# EAGLE board v1_schematic (EAGLE 9.0.1)

Size 166.17 x 99.43 mm. Coordinates in mm from the lower left corner, seen from the top.
Outline: 0.38,0.13 166.17,0 165.91,99.43 0,99.05 0.38,0.13
Copper layers (1*16): Top 0.035mm / dielectric 1.5mm / Bottom 0.035mm
Design rules "default": minimum track width 6mil, minimum drill 0.35mm, track to track 6mil, track to pad 6mil, pad to pad 6mil, via to via 6mil, smd to smd 6mil, copper to edge 40mil, drill to drill 6mil, minimum pad ring 10mil, minimum via ring 8mil, stop-mask expansion 4mil, vias tented up to drill 0mil, thermal gap 10mil

## Footprints (pad centres in the part's own frame; a part is rotated, then mirrored left to right if it is on the bottom)
C0805 = smd 1.3 x 1.5: 1 -0.95,0; 2 0.95,0
153CLV-1014 = smd 4.3 x 2.5: + 4.15,0; - -4.15,0
E5-6 = drill 0.813 pad 1.905: + -2.54,0 | drill 0.813 pad 1.905 octagon: - 2.54,0
0603-CAP = smd 1.1 x 1: 1 -0.85,0; 2 0.85,0
C4111-15 = drill 1.499 long: A 7.62,0; C -7.62,0
SOD323(F) = smd 0.5 x 0.5: 1 1.1,0; 2 -1.1,0
SJ_2W = smd 1.27 x 2.54: 1 -2.54,0; 2 0,0; 3 2.54,0
3,2-PAD = drill 3.2 pad 5.842: B3,2 0,0
DIL08 = drill 0.813 long: 1 -3.81,-3.81; 2 -1.27,-3.81; 3 1.27,-3.81; 4 3.81,-3.81; 5 3.81,3.81; 6 1.27,3.81; 7 -1.27,3.81; 8 -3.81,3.81
SSOP28 = smd 0.4 x 1.5: 1 -4.225,-3.625; 2 -3.575,-3.625; 3 -2.925,-3.625; 4 -2.275,-3.625; 5 -1.625,-3.625; 6 -0.975,-3.625; 7 -0.325,-3.625; 8 0.325,-3.625; 9 0.975,-3.625; 10 1.625,-3.625; 11 2.275,-3.625; 12 2.925,-3.625; 13 3.575,-3.625; 14 4.225,-3.625; 15 4.225,3.625; 16 3.575,3.625; 17 2.925,3.625; 18 2.275,3.625; 19 1.625,3.625; 20 0.975,3.625; 21 0.325,3.625; 22 -0.325,3.625; 23 -0.975,3.625; 24 -1.625,3.625; 25 -2.275,3.625; 26 -2.925,3.625; 27 -3.575,3.625; 28 -4.225,3.625
DIL20 = drill 0.813 long: 1 -11.43,-3.81; 2 -8.89,-3.81; 3 -6.35,-3.81; 4 -3.81,-3.81; 5 -1.27,-3.81; 6 1.27,-3.81; 7 3.81,-3.81; 8 6.35,-3.81; 9 8.89,-3.81; 10 11.43,-3.81; 11 11.43,3.81; 12 8.89,3.81; 13 6.35,3.81; 14 3.81,3.81; 15 1.27,3.81; 16 -1.27,3.81; 17 -3.81,3.81; 18 -6.35,3.81; 19 -8.89,3.81; 20 -11.43,3.81
TO220-5 = drill 0.9 long: 1 -3.4,-8.4; 2 -1.7,-4.5; 3 0,-8.4; 4 1.7,-4.5; 5 3.4,-8.4
JP2W = drill 0.914 long: 1 -2.54,-1.27; 2 0,-1.27; 3 2.54,-1.27
0402 = smd 0.7 x 0.9: 1 -0.65,0; 2 0.65,0
PE-53116NL = drill 1.01 pad 1.51: 1 2.54,-15.88; 2 15.24,-15.88
SML0805 = smd 1.2 x 1.2: A 1.05,0; C -1.05,0
QS = drill 0.61 long: 1 -2.54,0; 2 2.54,0
TO18 = drill 0.813 octagon: 1 -1.27,-1.27; 2 1.27,-1.27; 3 1.27,1.27
SOT23 = smd 1 x 1.4: 1 -0.95,-1.1; 2 0.95,-1.1; 3 0,1.1
R0805 = smd 1.3 x 1.5: 1 -0.95,0; 2 0.95,0
PC25 = smd 2.2 x 0.8: 4 0,1.65 | smd 0.9 x 1.4: A -1.35,-1.9; E 1.35,-1.9; S 0,-1.9
STS121PC04 = drill 0.9 pad 1.8: 1 -2.5,0; 2 0,0; 3 2.5,0
DTS-6 = drill 1 long: 1 -3.25,2.25; 2 3.25,2.25; 3 -3.25,-2.25; 4 3.25,-2.25
ED350V-02P = drill 0.8: P$1 0,0; P$2 3.5,0
ON_SEMICONDUCTOR_NCP1117ST33T3G_0 = smd 2 x 1.5: 1 -3.15,2.3; 2 -3.15,0; 3 -3.15,-2.3 | smd 2 x 3.8: 4 3.15,0
ON_SEMICONDUCTOR_NCP1117ST50T3G_2 = smd 1.65 x 1: 1 -3.475,2.3; 2 -3.475,0; 3 -3.475,-2.3 | smd 1.65 x 3.2: 4 3.475,0
LQFP100 = smd 1.6 x 0.3: 1 -7.6,6; 2 -7.6,5.5; 3 -7.6,5; 4 -7.6,4.5; 5 -7.6,4; 6 -7.6,3.5; 7 -7.6,3; 8 -7.6,2.5; 9 -7.6,2; 10 -7.6,1.5; 11 -7.6,1; 12 -7.6,0.5; 13 -7.6,0; 14 -7.6,-0.5; 15 -7.6,-1; 16 -7.6,-1.5; 17 -7.6,-2; 18 -7.6,-2.5; 19 -7.6,-3; 20 -7.6,-3.5; 21 -7.6,-4; 22 -7.6,-4.5; 23 -7.6,-5; 24 -7.6,-5.5; 25 -7.6,-6; 51 7.6,-6; 52 7.6,-5.5; 53 7.6,-5; 54 7.6,-4.5; 55 7.6,-4; 56 7.6,-3.5; 57 7.6,-3; 58 7.6,-2.5; 59 7.6,-2; 60 7.6,-1.5; 61 7.6,-1; 62 7.6,-0.5; 63 7.6,0; 64 7.6,0.5; 65 7.6,1; 66 7.6,1.5; 67 7.6,2; 68 7.6,2.5; 69 7.6,3; 70 7.6,3.5; 71 7.6,4; 72 7.6,4.5; 73 7.6,5; 74 7.6,5.5; 75 7.6,6 | smd 0.3 x 1.6: 26 -6,-7.6; 27 -5.5,-7.6; 28 -5,-7.6; 29 -4.5,-7.6; 30 -4,-7.6; 31 -3.5,-7.6; 32 -3,-7.6; 33 -2.5,-7.6; 34 -2,-7.6; 35 -1.5,-7.6; 36 -1,-7.6; 37 -0.5,-7.6; 38 0,-7.6; 39 0.5,-7.6; 40 1,-7.6; 41 1.5,-7.6; 42 2,-7.6; 43 2.5,-7.6; 44 3,-7.6; 45 3.5,-7.6; 46 4,-7.6; 47 4.5,-7.6; 48 5,-7.6; 49 5.5,-7.6; 50 6,-7.6; 76 6,7.6; 77 5.5,7.6; 78 5,7.6; 79 4.5,7.6; 80 4,7.6; 81 3.5,7.6; 82 3,7.6; 83 2.5,7.6; 84 2,7.6; 85 1.5,7.6; 86 1,7.6; 87 0.5,7.6; 88 0,7.6; 89 -0.5,7.6; 90 -1,7.6; 91 -1.5,7.6; 92 -2,7.6; 93 -2.5,7.6; 94 -3,7.6; 95 -3.5,7.6; 96 -4,7.6; 97 -4.5,7.6; 98 -5,7.6; 99 -5.5,7.6; 100 -6,7.6
SPC4078 = drill 0.8 pad 2.184 long: 1 -3,0; 2 0,-4.8 | drill 1 pad 2.184 long: 3 3,0
MICROSD-PUSH-OUT = smd 0.5 x 0.75: 1 9.625,0.225; 2 8.525,0.225; 3 7.425,0.225; 4 6.325,0.225; 5 5.225,0.225; 6 4.125,0.225; 7 3.025,0.225; 8 1.925,0.225; CD 0.825,0.225 | smd 1.2 x 1.8: G1 -0.375,-0.8 | smd 1.2 x 2.2: G2 -0.375,-10.1; G4 15.125,-10.1 | smd 1.6 x 1.5: G3 13.95,-0.55
32005-201 = smd 3.1 x 0.5: 1 3,1.6; 2 3,0.8; 3 3,0; 4 3,-0.8; 5 3,-1.6 | smd 2.5 x 2: M1 -3,-4.45; M2 -3,4.45 | smd 3.3 x 2: M3 2.9,4.45; M4 2.9,-4.45 | hole 0.9: 0,2.2; 0,-2.2
F09VB = drill 1.016 octagon: 1 -5.486,-1.422; 2 -2.743,-1.422; 3 0,-1.422; 4 2.743,-1.422; 5 5.486,-1.422; 6 -4.115,1.422; 7 -1.372,1.422; 8 1.372,1.422; 9 4.115,1.422
W237-102 = drill 1.194 long: 1 -2.5,-1.27; 2 2.5,-1.27
W237-6 = drill 1.194 long: 1 -12.5,-1.27; 2 -7.5,-1.27; 3 -2.5,-1.27; 4 2.5,-1.27; 5 7.5,-1.27; 6 12.5,-1.27
5566-20 = drill 1.4 square: 1 18.9,-2.75; 2 14.7,-2.75; 3 10.5,-2.75; 4 6.3,-2.75; 5 2.1,-2.75; 6 -2.1,-2.75; 7 -6.3,-2.75; 8 -10.5,-2.75; 9 -14.7,-2.75; 10 -18.9,-2.75; 11 18.9,2.75; 12 14.7,2.75; 13 10.5,2.75; 14 6.3,2.75; 15 2.1,2.75; 16 -2.1,2.75; 17 -6.3,2.75; 18 -10.5,2.75; 19 -14.7,2.75; 20 -18.9,2.75 | hole 3: 23.6,2.29; -23.6,2.29
5566-8 = drill 1.4 square: 1 6.3,-2.75; 2 2.1,-2.75; 3 -2.1,-2.75; 4 -6.3,-2.75; 5 6.3,2.75; 6 2.1,2.75; 7 -2.1,2.75; 8 -6.3,2.75 | hole 3: 11,2.29; -11,2.29
PC817SMTW = smd 1.7 x 2.2: 1 -1.27,-5.1; 2 1.27,-5.1; 3 1.27,5.1; 4 -1.27,5.1
W237-103 = drill 1.194 long: 1 -5,-1.29; 2 0,-1.29; 3 5,-1.29

## Placement (x,y rotation side)
C1  20pF  [C0805]  50.04,37.21 180 top
C2  20pF  [C0805]  50.16,44.2 180 top
C3  2pF  [C0805]  64.14,54.61 90 top
C4  2pF  [C0805]  64.14,59.94 270 top
C5  100nF  [C0805]  54.1,13.46 90 top
C6  100nF  [C0805]  58.55,13.46 90 top
C7  100nF  [C0805]  43.18,19.3 180 top
C8  100nF  [C0805]  43.18,14.48 180 top
C9  100nF  [C0805]  43.18,23.75 180 top
C10  0.1uF  [C0805]  -146.94,135.51 0 top  (outside the outline)
C11  0.1uF  [C0805]  -153.29,135.51 0 top  (outside the outline)
C12  0.1uF  [C0805]  -159.64,135.51 0 top  (outside the outline)
C13  0.1uF  [C0805]  -165.99,135.51 0 top  (outside the outline)
C14  100nF  [C0805]  107.19,47.88 270 top
C15  100nF  [C0805]  85.72,29.46 270 top
C16  100nF  [C0805]  91.19,53.47 90 top
C17  100nF  [C0805]  -119.63,51.56 90 top  (outside the outline)
C18  100nF  [C0805]  -119.63,45.21 90 top  (outside the outline)
C19  100nF  [C0805]  -119.63,38.86 90 top  (outside the outline)
C20  100nF  [C0805]  -119.63,32.51 90 top  (outside the outline)
C21  100nF  [C0805]  -119.63,26.16 90 top  (outside the outline)
C22  100nF  [C0805]  -119.63,19.81 90 top  (outside the outline)
C23  100nF  [C0805]  -119.63,13.46 90 top  (outside the outline)
C24  100nF  [C0805]  -119.63,7.11 90 top  (outside the outline)
C25  100nF  [C0805]  -119.63,0.76 90 top  (outside the outline)
C26  100nF  [C0805]  -119.63,-5.59 90 top  (outside the outline)
C27  100nF  [C0805]  -119.63,-11.94 90 top  (outside the outline)
C28  100nF  [C0805]  -119.63,-18.29 90 top  (outside the outline)
C29  100nF  [C0805]  -119.63,-24.64 90 top  (outside the outline)
C30  100nF  [C0805]  -119.63,-30.99 90 top  (outside the outline)
C31  100nF  [C0805]  -119.63,-37.34 90 top  (outside the outline)
C32  100nF  [C0805]  -119.63,-43.69 90 top  (outside the outline)
C33  100nF  [C0805]  -119.63,-50.04 90 top  (outside the outline)
C34  100nF  [C0805]  -119.63,-56.39 90 top  (outside the outline)
C35  100nF  [C0805]  -119.63,-62.74 90 top  (outside the outline)
C36  4.7uF  [C0805]  -119.76,-77.72 90 top  (outside the outline)
C37  100nF  [C0805]  -104.9,-69.22 90 top  (outside the outline)
C38  100nF  [C0805]  -119.89,-83.57 90 top  (outside the outline)
C39  4.7uF  [C0805]  -107.19,61.47 90 top  (outside the outline)
C40  1uF  [C0805]  -104.9,-63.75 90 top  (outside the outline)
C41  1uF  [C0805]  -111.12,148.72 0 top  (outside the outline)
C42  0.1uF  [C0805]  -107.19,55.12 90 top  (outside the outline)
C43  47uF  [153CLV-1014]  29.84,28.83 180 top
C44  1000uF 25V  [E5-6]  -106.3,113.92 0 top  (outside the outline)
C45  47uF  [153CLV-1014]  30.1,50.67 180 top
C46  100nF  [0603-CAP]  -144.4,165.99 0 top  (outside the outline)
C47  47uF  [0603-CAP]  -148.21,165.99 0 top  (outside the outline)
C48  47uF  [0603-CAP]  -152.02,165.99 0 top  (outside the outline)
C49  1000uF 25V  [E5-6]  -124.08,113.92 0 top  (outside the outline)
C50  100uF 25V  [E5-6]  -140.59,113.92 0 top  (outside the outline)
C51  100nF  [C0805]  63.12,28.45 180 top
C52  0.1uF  [C0805]  -50.42,141.86 0 top  (outside the outline)
D1  1N5908  [C4111-15]  5.97,28.07 90 top
D2  BZX84J  [SOD323(F)]  -140.59,165.99 0 top  (outside the outline)
DIR1  [SJ_2W]  91.85,-195.31 0 top  (outside the outline)
DIR2  [SJ_2W]  84.23,-195.31 0 top  (outside the outline)
DIR3  [SJ_2W]  76.61,-195.31 0 top  (outside the outline)
DIR4  [SJ_2W]  68.99,-195.31 0 top  (outside the outline)
DIR5  [SJ_2W]  61.37,-195.31 0 top  (outside the outline)
DIR6  [SJ_2W]  53.75,-195.31 0 top  (outside the outline)
DIR7  [SJ_2W]  46.13,-195.31 0 top  (outside the outline)
DIR8  [SJ_2W]  38.51,-195.31 0 top  (outside the outline)
DIR9  [SJ_2W]  30.89,-195.31 0 top  (outside the outline)
DIR10  [SJ_2W]  23.27,-195.31 0 top  (outside the outline)
DIR11  [SJ_2W]  15.65,-195.31 0 top  (outside the outline)
DIR12  [SJ_2W]  -37.72,159.64 0 top  (outside the outline)
DIR13  [SJ_2W]  -45.34,159.64 0 top  (outside the outline)
DIR14  [SJ_2W]  -52.96,159.64 0 top  (outside the outline)
DIR15  [SJ_2W]  -60.58,159.64 0 top  (outside the outline)
DIR16  [SJ_2W]  -68.2,159.64 0 top  (outside the outline)
H1  MOUNT-PAD-ROUND3.2  [3,2-PAD]  -38.99,115.19 0 top  (outside the outline)
H2  MOUNT-PAD-ROUND3.2  [3,2-PAD]  -47.88,115.19 0 top  (outside the outline)
H3  MOUNT-PAD-ROUND3.2  [3,2-PAD]  -56.77,115.19 0 top  (outside the outline)
IC1  PCA82C250  [DIL08]  109.09,57.79 0 top
IC2  FT232RL  [SSOP28]  52.83,20.83 180 top
IC3  SP3223EBP  [DIL20]  104.52,27.05 180 top
IC4  MAX481CPA  [DIL08]  120.52,42.55 0 top
IC5  LM2576T  [TO220-5]  12.83,22.23 90 top
JP1  [JP2W]  -38.99,78.36 0 top  (outside the outline)
L1  BLM15HB121SN1  [0402]  58.17,29.46 270 top
L2  BLM15HB121SN1  [0402]  66.67,35.56 0 top
L3  PE-53116NL 220uH 50Hz  [PE-53116NL]  19.94,39.75 180 top
LED2  [SML0805]  62.74,19.43 0 top
LED3  [SML0805]  62.74,23.37 0 top
NPN1  [SJ_2W]  114.61,-151.23 0 top  (outside the outline)
NPN2  [SJ_2W]  106.99,-151.23 0 top  (outside the outline)
NPN3  [SJ_2W]  99.37,-151.23 0 top  (outside the outline)
NPN4  [SJ_2W]  91.75,-151.23 0 top  (outside the outline)
NPN5  [SJ_2W]  84.13,-151.23 0 top  (outside the outline)
NPN6  [SJ_2W]  76.51,-151.23 0 top  (outside the outline)
NPN7  [SJ_2W]  68.89,-151.23 0 top  (outside the outline)
NPN8  [SJ_2W]  61.27,-151.23 0 top  (outside the outline)
NPN9  [SJ_2W]  53.65,-151.23 0 top  (outside the outline)
NPN10  [SJ_2W]  46.03,-151.23 0 top  (outside the outline)
PNP1  [SJ_2W]  38.41,-151.23 0 top  (outside the outline)
PNP2  [SJ_2W]  30.79,-151.23 0 top  (outside the outline)
PNP3  [SJ_2W]  23.17,-151.23 0 top  (outside the outline)
PNP4  [SJ_2W]  15.7,-151.25 0 top  (outside the outline)
PNP5  [SJ_2W]  8.08,-151.25 0 top  (outside the outline)
PNP6  [SJ_2W]  0.46,-151.25 0 top  (outside the outline)
PNP7  [SJ_2W]  -7.16,-151.25 0 top  (outside the outline)
PNP8  [SJ_2W]  -14.78,-151.25 0 top  (outside the outline)
PNP9  [SJ_2W]  -22.4,-151.25 0 top  (outside the outline)
PNP10  [SJ_2W]  -30.02,-151.25 0 top  (outside the outline)
Q1  25MHz  [QS]  56.77,40.26 90 top
Q2  32.768kHz  [QS]  56.64,52.96 270 top
Q3  2N2222A  [TO18]  -16.13,154.56 0 top  (outside the outline)
Q4  [SOT23]  136.53,33.27 0 top
Q5  [SOT23]  136.53,26.04 0 top
Q6  [SOT23]  136.53,18.8 0 top
Q7  [SOT23]  136.53,11.56 0 top
Q8  [SOT23]  136.53,4.32 0 top
R1  390  [R0805]  64.52,43.18 0 top
R2  0  [R0805]  64.26,49.4 0 top
R3  0  [R0805]  64.39,46.61 0 top
R4  10K  [R0805]  -201.55,131.95 0 top  (outside the outline)
R5  1k  [R0805]  68.83,19.43 180 top
R6  1k  [R0805]  68.71,23.37 180 top
R7  10K  [R0805]  77.47,56.77 90 top
R8  10K  [R0805]  80.77,71.25 90 top
R9  10K  [R0805]  49.02,71.12 90 top
R10  10K  [R0805]  29.34,78.61 0 top
R11  0  [R0805]  64.52,39.37 180 top
R12  25K to 200K  [PC25]  -113.92,105.03 0 top  (outside the outline)
R13  120  [R0805]  -75.82,141.86 0 top  (outside the outline)
R14  120  [R0805]  -82.17,141.86 0 top  (outside the outline)
R15  20K  [R0805]  -88.52,141.86 0 top  (outside the outline)
R16  10K  [R0805]  -94.87,141.86 0 top  (outside the outline)
R17  20K  [R0805]  -101.22,141.86 0 top  (outside the outline)
R18  10K  [R0805]  -107.57,141.86 0 top  (outside the outline)
R19  10K  [R0805]  -113.92,141.86 0 top  (outside the outline)
R20  4k7  [R0805]  -120.27,141.86 0 top  (outside the outline)
R21  4k7  [R0805]  -126.62,141.86 0 top  (outside the outline)
R22  4k7  [R0805]  53.34,29.34 90 top
R23  1k  [R0805]  128.4,31.62 90 top
R24  1k  [R0805]  128.4,25.27 90 top
R25  1k  [R0805]  128.4,18.92 90 top
R26  1k  [R0805]  128.4,12.57 90 top
R27  1k  [R0805]  128.4,6.22 90 top
R28  10K  [R0805]  48.13,29.34 270 top
R29  100R  [R0805]  68.96,27.43 270 top
R30  10K  [R0805]  -37.72,148.21 0 top  (outside the outline)
R31  10K  [R0805]  -44.07,148.21 0 top  (outside the outline)
R32  10K  [R0805]  -50.42,148.21 0 top  (outside the outline)
R33  10K  [R0805]  -56.77,148.21 0 top  (outside the outline)
R34  10K  [R0805]  -63.12,148.21 0 top  (outside the outline)
R35  10K  [R0805]  -69.47,148.21 0 top  (outside the outline)
R36  220R  [R0805]  -45.34,135.51 0 top  (outside the outline)
R37  220R  [R0805]  -51.69,135.51 0 top  (outside the outline)
R38  220R  [R0805]  -58.04,135.51 0 top  (outside the outline)
R39  220R  [R0805]  -64.39,135.51 0 top  (outside the outline)
R40  220R  [R0805]  -70.74,135.51 0 top  (outside the outline)
R41  220R  [R0805]  -77.09,135.51 0 top  (outside the outline)
R42  220R  [R0805]  -83.44,135.51 0 top  (outside the outline)
R43  220R  [R0805]  -89.79,135.51 0 top  (outside the outline)
R44  220R  [R0805]  -96.14,135.51 0 top  (outside the outline)
R45  220R  [R0805]  -102.49,135.51 0 top  (outside the outline)
R46  220R  [R0805]  -108.84,135.51 0 top  (outside the outline)
R47  220R  [R0805]  -115.19,135.51 0 top  (outside the outline)
R48  220R  [R0805]  -121.54,135.51 0 top  (outside the outline)
R49  220R  [R0805]  -127.89,135.51 0 top  (outside the outline)
R50  220R  [R0805]  -134.24,135.51 0 top  (outside the outline)
R51  220R  [R0805]  -140.59,135.51 0 top  (outside the outline)
S1  STS121PC04  [STS121PC04]  -202.82,142.62 0 top  (outside the outline)
S2  DTS-6  [DTS-6]  99.19,47.37 0 top
S3  STS121PC04  [STS121PC04]  77.34,65.15 0 top
T1  ST02-3.5MM  [ED350V-02P]  119.38,54.61 0 top
U1  ON_SEMICONDUCTOR_NCP1117ST33T3GON_SEMICONDUCTOR_NCP1117ST33T3G_0_0  [ON_SEMICONDUCTOR_NCP1117ST33T3G_0]  30.86,61.59 0 top
U2  ON_SEMICONDUCTOR_NCP1117ST50T3GON_SEMICONDUCTOR_NCP1117ST50T3G_0_2  [ON_SEMICONDUCTOR_NCP1117ST50T3G_2]  30.35,39.75 0 top
U$1  STM32F40XSTM32D40X  [LQFP100]  80.39,44.07 0 top
U$2  [SPC4078]  24,10.79 90 top
U$3  MICROSD-PUSH-OUT  [MICROSD-PUSH-OUT]  107.06,70.99 180 top
X1  MINI-USB-32005-201  [32005-201]  51.18,5.33 90 top
X2  [F09VB]  145.8,62.48 90 top
X3  [F09VB]  131.95,62.36 90 top
X4  [W237-102]  6.92,5.26 0 top
X5  [W237-6]  146.3,29.97 90 top
X6  5566-20  [5566-20]  57.33,79.91 0 top
X7  5566-8  [5566-8]  120.78,83.44 0 top
X8  5566-8  [5566-8]  146.56,-1.78 90 top
X9  PC817SW  [PC817SMTW]  112.22,-101 0 top  (outside the outline)
X10  PC817SW  [PC817SMTW]  131.03,115.47 0 top  (outside the outline)
X11  PC817SW  [PC817SMTW]  103.54,-100.98 0 top  (outside the outline)
X12  PC817SW  [PC817SMTW]  94.65,-100.98 0 top  (outside the outline)
X13  PC817SW  [PC817SMTW]  85.76,-100.98 0 top  (outside the outline)
X14  PC817SW  [PC817SMTW]  76.87,-100.98 0 top  (outside the outline)
X15  PC817SW  [PC817SMTW]  67.98,-100.98 0 top  (outside the outline)
X16  PC817SW  [PC817SMTW]  59.09,-100.98 0 top  (outside the outline)
X17  PC817SW  [PC817SMTW]  50.2,-100.98 0 top  (outside the outline)
X18  PC817SW  [PC817SMTW]  41.31,-100.98 0 top  (outside the outline)
X19  PC817SW  [PC817SMTW]  32.42,-100.98 0 top  (outside the outline)
X20  PC817SW  [PC817SMTW]  122.35,115.39 0 top  (outside the outline)
X21  PC817SW  [PC817SMTW]  113.46,115.39 0 top  (outside the outline)
X22  PC817SW  [PC817SMTW]  104.57,115.39 0 top  (outside the outline)
X23  PC817SW  [PC817SMTW]  95.68,115.39 0 top  (outside the outline)
X24  PC817SW  [PC817SMTW]  86.79,115.39 0 top  (outside the outline)
X25  [W237-103]  149.73,-24 0 top  (outside the outline)
X26  [W237-103]  134.49,-24 0 top  (outside the outline)
X27  [W237-103]  119.25,-24 0 top  (outside the outline)
X28  [W237-103]  104.01,-24 0 top  (outside the outline)
X29  [W237-103]  88.77,-24 0 top  (outside the outline)
X30  [W237-103]  73.53,-24 0 top  (outside the outline)
X31  [W237-103]  58.23,-23.99 0 top  (outside the outline)
X32  [W237-103]  42.99,-23.99 0 top  (outside the outline)
X33  [W237-103]  27.75,-23.99 0 top  (outside the outline)
X34  [W237-103]  12.51,-23.99 0 top  (outside the outline)
X35  [W237-102]  134.57,130.15 0 top  (outside the outline)
X36  [W237-102]  124.41,130.15 0 top  (outside the outline)
X37  [W237-102]  114.25,130.15 0 top  (outside the outline)
X38  [W237-102]  104.09,130.15 0 top  (outside the outline)
X39  [W237-102]  93.93,130.15 0 top  (outside the outline)
X40  [W237-102]  83.77,130.15 0 top  (outside the outline)

## Library data of the parts
C1-C42 C51 C52 R1-R3 R5 R6 R11 R13 R14 R23-R27 R29 = resistor
C43-C45 C49 C50 = rcl; SPICEPREFIX: C
C46-C48 = SparkFun-Capacitors
D1 = diode
D2 = NXP_60_26022015
DIR1-DIR16 JP1 NPN1-NPN10 PNP1-PNP10 = jumper
H1-H3 = holes
IC1 = micro-philips; OC_FARNELL: 3692358; OC_NEWARK: unknown
IC2 = ftdichip; MPN: FT232RL; OC_FARNELL: 1146032; OC_NEWARK: 91K9918
IC3 = sipex; OC_FARNELL: unknown; OC_NEWARK: unknown
IC4 = maxim; MPN: MAX481CPA+; OC_FARNELL: unknown; OC_NEWARK: 99K3445
IC5 = v-reg-3-new
L1 L2 = inductors
L3 = PE-53116NL; DESCRIPTION: Fixed Inductors 220uH 3A; HEIGHT: mm; MANUFACTURER_NAME: Pulse; MANUFACTURER_PART_NUMBER: PE-53116NL; MOUSER_PART_NUMBER: 673-PE-53116NL
LED2 LED3 = led
Q1 Q2 = special
Q3 = transistor-npn
Q4-Q8 = semicon-smd-ipc
R4 R7-R10 R15-R22 R28 R30-R51 = rcl; SPICEPREFIX: R
R12 = pot-vitrohm; MF: CLAROSTAT; MPN: 308NPC25KS; OC_FARNELL: 1440998; OC_NEWARK: 03F7518
S1 S3 = switches; DIGIKEY: 450-1609-ND
S2 = switch-tact
T1 = con-dinkle
U1 = ON Semiconductor - NCP1117ST33T3G; CASE_CODE_IMPERIAL: 0603; CASE_CODE_METRIC: 1608; CASE_PACKAGE: 0603; CIIVA_IDS: 19354120; COMPONENT_LINK_1_DESCRIPTION: Manufacturer URL; COMPONENT_LINK_1_URL: http://www.onsemi.com/; DATASHEET: http://www.onsemi.com/pub_link/Collateral/NCP1117-D.PDF; DATASHEET_VERSION: Rev. 27, 09/2014; FOOTPRINT_VARIANT_NAME_0: Manufacturer Recommended; HEIGHT: 0.45 mm; IMPORTED: yes; IMPORTED_FROM: vault; IMPORT_TS: 1521845423; LENGTH: 1.55 mm; MAX_OPERATING_TEMPERATURE: 155 degC; MF: ON Semiconductor; MIN_OPERATING_TEMPERATURE: -55 degC; MOUNT: Surface Mount; MPN: NCP1117ST33T3G; PACKAGE: SOT-223-4-318H-01_A; PACKAGE_DESCRIPTION: 4-Pin Small Outline Transistor, Body 6.5 x 3.5 mm, Pitch 2.3 mm; PACKAGE_QUANTITY: 5000; PACKAGING: Tape and Reel; POWER_RATING: 100 mW; PREFIX: U; RADIATION_HARDENING: No; REACH_SVHC: Unknown; RELEASE_DATE: 1475065185; RESISTANCE: 220 kohm; RO_HSCOMPLIANT: true; TOLERANCE: 1%; TYPE_RESISTOR: Thick Film; VAULT_GUID: C6E429D0-32F2-4CA3-9C68-29F3FC9DADEB; VAULT_REVISION: 6AD56B9F-4B97-41F2-91E8-97C557B92B31; VOLTAGE_RATING: 75 V; WEIGHT: 7.1E-05 oz; WIDTH: 0.85 mm
U2 = ON Semiconductor - NCP1117ST50T3G; CIIVA_IDS: 19354121; COMPONENT_LINK_1_DESCRIPTION: Manufacturer URL; COMPONENT_LINK_1_URL: http://www.onsemi.com/; COMPONENT_LINK_3_DESCRIPTION: Package Specification; COMPONENT_LINK_3_URL: http://www.onsemi.com/pub_link/Collateral/318H-01.PDF; DATASHEET: http://www.onsemi.com/pub_link/Collateral/NCP1117-D.PDF; DATASHEET_VERSION: Rev. 26; DROPOUT_VOLTAGE: 1.2 V; FOOTPRINT_VARIANT_NAME_0: Level C; FOOTPRINT_VARIANT_NAME_1: Level B; FOOTPRINT_VARIANT_NAME_2: Level A; IMPORTED: yes; IMPORTED_FROM: vault; IMPORT_TS: 1521847243; IOUT_MIN: 1 A; IQ: 6 mA; MF: ON Semiconductor; MOUNTING_TECHNOLOGY: Surface Mount; MPN: NCP1117ST50T3G; NOMINAL_OUTPUT_VOLTAGE: 5 V; OPERATING_TEMPERATURE: 0 to 125 degC; PACKAGE: SOT-223; PACKAGE_DESCRIPTION: 4-Pin Small Out-Line Transistor, Body 3.5 x 6.5 mm, Pitch 2.3 mm; PACKING: Tape and Reel; PREFIX: U; RELEASE_DATE: 1385348949; RR: 61 dB; VAULT_GUID: CAB80007-3002-407D-8F59-BB02D59733C7; VAULT_REVISION: 987D8771-C9B4-4194-9817-534179016626; VIN: 20 V
U$1 = stm32f
U$2 = con-jack; OC_FARNELL: unknown; OC_NEWARK: unknown
U$3 = microsd
X1 = con-cypressindustries; OC_FARNELL: unknown; OC_NEWARK: unknown
X2 X3 = con-subd; OC_FARNELL: unknown; OC_NEWARK: unknown
X4 X35-X40 = con-wago-500; MPN: 237-102; OC_FARNELL: unknown; OC_NEWARK: 70K9898
X5 = con-wago-500; OC_FARNELL: unknown; OC_NEWARK: unknown
X6-X8 = con-molex; MF: MOLEX; OC_FARNELL: unknown; OC_NEWARK: unknown
X9-X24 = GadgetFactory_v1
X25-X34 = con-wago-500; MPN: 237-103; OC_FARNELL: unknown; OC_NEWARK: 18M7116

## Nets
+3V3: C17.1 C18.1 C19.1 C20.1 C21.1 C22.1 C23.1 C24.1 C25.1 C26.1 C27.1 C28.1 C29.1 C30.1 C31.1 C32.1 C33.1 C34.1 C35.1 C36.1 C39.1 C45.+ C46.1 C49.+ C52.1 L2.1 PNP1.1 PNP2.1 PNP3.1 PNP4.1 PNP5.1 PNP6.1 PNP7.1 PNP8.1 PNP9.1 PNP10.1 R23.2 R24.2 R25.2 R26.2 R27.2 S1.3 S3.3 U1.2 U1.4 U$1.11 U$1.19 U$1.28 U$1.50 U$1.75 U$1.100 U$3.4 X6.1 X6.2 X7.2 X8.2
+12V: C43.+ C44.+ C47.1 IC5.4 JP1.1 L3.2 U1.3 U2.3
BOOT0: R7.1 U$1.94
BOOT1: R4.2 U$1.37
CAN1_RX: IC1.1 U$1.70
CAN1_TX: IC1.4 U$1.71
CANH: IC1.7 R13.2 R14.2 X3.7
CANL: R13.1 R14.1 X3.2
COM1: X10.3 X35.2
COM2: X20.3 X36.2
COM3: X21.3 X37.2
COM4: X22.3 X38.2
COM5: X23.3 X39.2
COM6: X24.3 X40.2
CTS#: IC2.11
DCD#: IC2.10
DSR#: IC2.9
DTR#: C51.2 IC2.2
ETH_MISO: U$1.31 U$1.53 X8.7
ETH_MOSI: U$1.32 U$1.54 X8.6
ETH_SCK: U$1.30 U$1.52 X8.4
ETH_SS: U$1.29 U$1.51 X8.3
GND: C1.2 C2.2 C3.2 C4.2 C5.2 C6.2 C7.2 C8.2 C9.2 C12.2 C13.2 C14.1 C15.2 C16.2 C17.2 C18.2 C19.2 C20.2 C21.2 C22.2 C23.2 C24.2 C25.2 C26.2 C27.2 C28.2 C29.2 C30.2 C31.2 C32.2 C33.2 C34.2 C35.2 C36.2 C37.2 C38.2 C39.2 C40.2 C41.2 C42.2 C43.- C44.- C45.- C46.2 C47.2 C48.2 C49.- C50.- C52.2 D1.A IC1.2 IC2.7 IC2.18 IC2.21 IC2.25 IC2.26 IC3.18 IC4.5 IC5.3 NPN1.3 NPN2.3 NPN3.3 NPN4.3 NPN5.3 NPN6.3 NPN7.3 NPN8.3 NPN9.3 NPN10.3 Q8.2 R8.2 R9.2 R10.2 R12.A R15.1 R16.1 R18.1 R19.1 R20.1 R21.1 R28.1 R30.1 R31.1 R32.1 R33.1 R34.2 R35.2 S1.1 S2.1 S2.2 S3.1 U2.1 U$1.10 U$1.20 U$1.27 U$1.74 U$1.99 U$2.3 U$3.6 U$3.G1 U$3.G2 U$3.G3 U$3.G4 X1.4 X1.5 X3.3 X4.1 X6.4 X6.6 X6.8 X6.10 X6.12 X6.14 X6.16 X6.18 X6.20 X7.1 X8.1 X8.5 X8.8 X9.3 X10.2 X11.3 X12.3 X13.3 X14.3 X15.3 X16.3 X17.3 X18.3 X19.3 X20.2 X21.2 X22.2 X23.2 X24.2 X25.1 X26.1 X27.1 X28.1 X29.1 X30.1 X31.1 X32.1 X33.1 X34.1
GND2: Q8.3 X2.5 X5.6
IN1: DIR1.3 NPN1.1 PNP1.3 X25.2
IN2: DIR2.3 NPN2.1 PNP2.3 X26.2
IN3: DIR3.3 NPN3.1 PNP3.3 X27.2
IN4: DIR4.3 NPN4.1 PNP4.3 X28.2
IN5: DIR5.3 NPN5.1 PNP5.3 X29.2
IN6: DIR6.3 NPN6.1 PNP6.3 X30.2
IN7: DIR7.3 NPN7.1 PNP7.3 X31.2
IN8: DIR8.3 NPN8.1 PNP8.3 X32.2
IN9: DIR9.3 NPN9.1 PNP9.3 X33.2
IN10: DIR10.3 NPN10.1 PNP10.3 X34.2
N$1: PNP1.2 R37.2
N$2: C15.1 U$1.49
N$3: C2.1 Q1.2 R1.1
N$4: C5.1 L1.1 R22.2 X1.1
N$7: C3.1 Q2.2 R3.1
N$8: C4.1 Q2.1 R2.1
N$9: C9.1 IC2.17
N$10: IC2.13
N$11: R4.1 S1.2
N$12: C7.1 IC2.16 X1.2
N$13: C6.1 IC2.15 X1.3
N$14: IC2.23 LED2.C
N$15: IC2.22 LED3.C
N$16: LED3.A R6.2
N$17: LED2.A R5.2
N$18: C10.2 IC3.4
N$19: C11.2 IC3.6
N$20: C11.1 IC3.5
N$21: C10.1 IC3.2
N$22: C13.1 IC3.7
N$23: C12.1 IC3.3
N$24: C14.2 S2.3 S2.4
N$25: R7.2 S3.2
N$27: IC4.7 T1.P$1
N$28: IC1.8 R12.E
N$29: IC4.6 T1.P$2
N$30: D2.2 Q3.2 R16.2
N$31: R37.1 X9.1
N$32: Q3.1 R15.2
N$33: NPN1.2 X9.2
N$35: D2.1 R17.1
N$36: IC5.5
N$37: JP1.3
N$38: JP1.2 X25.3 X26.3 X27.3 X28.3 X29.3 X30.3 X31.3 X32.3 X33.3 X34.3
N$39: PNP8.2 R44.2
N$40: C16.1 U$1.73
N$41: D1.C IC5.2 L3.1
N$42: IC2.14
N$43: IC3.1
N$44: IC3.14
N$45: IC3.11
N$46: IC2.12
N$47: DIR1.2 X9.4
N$48: R44.1 X17.1
N$49: Q4.1 R23.1
N$50: R8.1 X6.11
N$51: Q5.1 R24.1
N$52: Q6.1 R25.1
N$53: R9.1 X6.17
N$54: Q7.1 R26.1
N$55: Q8.1 R27.1
N$56: R10.1 X6.19
N$59: DIR11.2 R36.2
N$60: R36.1 X10.1
N$61: DIR12.2 R47.2
N$66: PNP2.2 R38.2
N$67: R38.1 X11.1
N$68: NPN2.2 X11.2
N$71: NPN8.2 X17.2
N$72: DIR2.2 X11.4
N$76: PNP3.2 R39.2
N$77: R39.1 X12.1
N$78: NPN3.2 X12.2
N$82: DIR3.2 X12.4
N$83: DIR8.2 X17.4
N$86: PNP4.2 R40.2
N$87: R40.1 X13.1
N$88: NPN4.2 X13.2
N$92: DIR4.2 X13.4
N$96: PNP5.2 R41.2
N$97: R41.1 X14.1
N$98: NPN5.2 X14.2
N$101: PNP9.2 R45.2
N$102: DIR5.2 X14.4
N$103: R45.1 X18.1
N$106: PNP6.2 R42.2
N$107: R42.1 X15.1
N$108: NPN6.2 X15.2
N$111: NPN9.2 X18.2
N$112: DIR6.2 X15.4
N$116: PNP7.2 R43.2
N$117: R43.1 X16.1
N$118: NPN7.2 X16.2
N$122: DIR7.2 X16.4
N$123: DIR9.2 X18.4
N$128: PNP10.2 R46.2
N$129: R46.1 X19.1
N$130: NPN10.2 X19.2
N$133: DIR10.2 X19.4
N$136: R47.1 X20.1
N$141: DIR13.2 R48.2
N$142: R48.1 X21.1
N$147: DIR14.2 R49.2
N$148: R49.1 X22.1
N$153: DIR15.2 R50.2
N$154: R50.1 X23.1
N$159: DIR16.2 R51.2
N$160: R51.1 X24.1
NRF_CE: U$1.92 X7.3
NRF_CS: U$1.93 X7.4
NRF_IRQ: U$1.95 X7.8
NRF_MISO: U$1.90 X7.7
NRF_MOSI: U$1.91 X7.6
NRF_SCK: U$1.89 X6.13 X7.5
OSCI: IC2.27
OSCO: IC2.28
OUT1: DIR11.3 X10.4 X35.1
OUT2: DIR12.3 X20.4 X36.1
OUT3: DIR13.3 X21.4 X37.1
OUT4: DIR14.3 X22.4 X38.1
OUT5: DIR15.3 X23.4 X39.1
OUT6: DIR16.3 X24.4 X40.1
PA8: U$1.67
PA9: U$1.68
PA10: U$1.69
PB9: U$1.96
PC0: DIR1.1 U$1.15
PC1: DIR2.1 U$1.16
PC2: DIR3.1 U$1.17
PC3: DIR4.1 U$1.18
PC4: DIR5.1 U$1.33
PC5: DIR6.1 U$1.34
PC6: DIR7.1 U$1.63
PC7: U$1.64
PC13: DIR8.1 U$1.7
PC14: R3.2 U$1.8
PC15: R2.2 U$1.9
PD0: DIR9.1 U$1.81
PD1: DIR10.1 U$1.82
PD7: DIR11.1 U$1.88
PD8: DIR12.1 U$1.55
PD9: DIR13.1 U$1.56
PD10: DIR14.1 U$1.57
PD11: DIR15.1 U$1.58
PD12: DIR16.1 U$1.59
PD13: U$1.60
PD14: U$1.61
PD15: U$1.62
PE0: U$1.97
PE1: U$1.98
PE2: U$1.1
PE3: U$1.2
PE4: U$1.3
PE5: U$1.4
PE6: U$1.5
PE7: U$1.38
PE8: U$1.39
PE9: U$1.40
PE10: U$1.41
PE11: U$1.42
PE12: U$1.43
PE13: U$1.44
PE14: U$1.45
PE15: U$1.46
PH0: R1.2 U$1.12
PH1: C1.1 Q1.1 U$1.13
R1IN: IC3.16 Q7.2 R21.2
R1IN_: Q7.3 X2.2 X5.5
R1OUT: U$1.35
R2IN: IC3.9 Q5.2 R20.2
R2IN_: Q5.3 X5.4
R2OUT: IC3.10
RESET: C51.1 R29.1 U$1.14
RESET#: X6.15
RI#: IC2.6
RTS#: IC2.3 R29.2
SD_CMD: R31.2 U$1.83 U$3.3
SD_D0: R33.2 U$1.65 U$3.7
SD_D1: R34.1 U$1.66 U$3.8
SD_D2: R35.1 U$1.78 U$3.1
SD_D3: R32.2 U$1.79 U$3.2
SD_SCK: R30.2 U$1.80 U$3.5
T1IN: U$1.36
T1OUT: IC3.17 Q6.2
T1OUT_: Q6.3 X2.3 X5.3
T2IN: IC3.12
T2OUT: IC3.8 Q4.2
T2OUT_: Q4.3
T20UT_: X5.2
TCK/SWCLK: U$1.76 X6.9
TDI: U$1.77 X6.5
TMS/SWDIO: U$1.72 X6.7
TRST: X6.3
UART4_RX: IC3.15 R18.2 U$1.24
UART4_TX: IC3.13 R19.2 U$1.23
USART2_CTS: U$1.84
USART2_RTS: IC4.2 IC4.3 U$1.85
USART2_RX: IC4.1 U$1.26 U$1.87
USART2_TX: IC4.4 U$1.25 U$1.86
USART3_RX: IC2.1 U$1.48
USART3_TX: IC2.5 U$1.47
VBAT: U$1.6
VCC: C8.1 C42.1 C48.1 IC1.3 IC2.4 IC2.19 IC2.20 IC3.19 IC3.20 IC4.8 L1.2 R5.1 R6.1 R22.1 R28.2 U2.2 U2.4 X5.1
VDDA: C37.1 C40.1 L2.2 R11.2 U$1.22
VIN: C50.+ IC5.1 Q3.3 R17.2 U$2.1 U$2.2 X4.2
VREF+: C38.1 C41.1 R11.1 U$1.21

## Tracks (layer width: path | path; a pad name or v marks a point on that pad's centre or on a via)
+3V3  (55 unrouted)
+12V  (7 unrouted)
BOOT0  (1 unrouted)
BOOT1  (1 unrouted)
CAN1_RX  (1 unrouted)
CAN1_TX  (1 unrouted)
CANH  (3 unrouted)
CANL  (2 unrouted)
COM1  (1 unrouted)
COM2  (1 unrouted)
COM3  (1 unrouted)
COM4  (1 unrouted)
COM5  (1 unrouted)
COM6  (1 unrouted)
DTR#  (1 unrouted)
ETH_MISO  (2 unrouted)
ETH_MOSI  (2 unrouted)
ETH_SCK  (2 unrouted)
ETH_SS  (2 unrouted)
GND  (145 unrouted)
GND2  (2 unrouted)
IN1  (3 unrouted)
IN2  (3 unrouted)
IN3  (3 unrouted)
IN4  (3 unrouted)
IN5  (3 unrouted)
IN6  (3 unrouted)
IN7  (3 unrouted)
IN8  (3 unrouted)
IN9  (3 unrouted)
IN10  (3 unrouted)
N$1  (1 unrouted)
N$2  (1 unrouted)
N$3  (2 unrouted)
N$4  (3 unrouted)
N$7  (2 unrouted)
N$8  (2 unrouted)
N$9  (1 unrouted)
N$11  (1 unrouted)
N$12  (2 unrouted)
N$13  (2 unrouted)
N$14  (1 unrouted)
N$15  (1 unrouted)
N$16  (1 unrouted)
N$17  (1 unrouted)
N$18  (1 unrouted)
N$19  (1 unrouted)
N$20  (1 unrouted)
N$21  (1 unrouted)
N$22  (1 unrouted)
N$23  (1 unrouted)
N$24  (2 unrouted)
N$25  (1 unrouted)
N$27  (1 unrouted)
N$28  (1 unrouted)
N$29  (1 unrouted)
N$30  (2 unrouted)
N$31  (1 unrouted)
N$32  (1 unrouted)
N$33  (1 unrouted)
N$35  (1 unrouted)
N$38  (10 unrouted)
N$39  (1 unrouted)
N$40  (1 unrouted)
N$41  (2 unrouted)
N$47  (1 unrouted)
N$48  (1 unrouted)
N$49  (1 unrouted)
N$50  (1 unrouted)
N$51  (1 unrouted)
N$52  (1 unrouted)
N$53  (1 unrouted)
N$54  (1 unrouted)
N$55  (1 unrouted)
N$56  (1 unrouted)
N$59  (1 unrouted)
N$60  (1 unrouted)
N$61  (1 unrouted)
N$66  (1 unrouted)
N$67  (1 unrouted)
N$68  (1 unrouted)
N$71  (1 unrouted)
N$72  (1 unrouted)
N$76  (1 unrouted)
N$77  (1 unrouted)
N$78  (1 unrouted)
N$82  (1 unrouted)
N$83  (1 unrouted)
N$86  (1 unrouted)
N$87  (1 unrouted)
N$88  (1 unrouted)
N$92  (1 unrouted)
N$96  (1 unrouted)
N$97  (1 unrouted)
N$98  (1 unrouted)
N$101  (1 unrouted)
N$102  (1 unrouted)
N$103  (1 unrouted)
N$106  (1 unrouted)
N$107  (1 unrouted)
N$108  (1 unrouted)
N$111  (1 unrouted)
N$112  (1 unrouted)
N$116  (1 unrouted)
N$117  (1 unrouted)
N$118  (1 unrouted)
N$122  (1 unrouted)
N$123  (1 unrouted)
N$128  (1 unrouted)
N$129  (1 unrouted)
N$130  (1 unrouted)
N$133  (1 unrouted)
N$136  (1 unrouted)
N$141  (1 unrouted)
N$142  (1 unrouted)
N$147  (1 unrouted)
N$148  (1 unrouted)
N$153  (1 unrouted)
N$154  (1 unrouted)
N$159  (1 unrouted)
N$160  (1 unrouted)
NRF_CE  (1 unrouted)
NRF_CS  (1 unrouted)
NRF_IRQ  (1 unrouted)
NRF_MISO  (1 unrouted)
NRF_MOSI  (1 unrouted)
NRF_SCK  (2 unrouted)
OUT1  (2 unrouted)
OUT2  (2 unrouted)
OUT3  (2 unrouted)
OUT4  (2 unrouted)
OUT5  (2 unrouted)
OUT6  (2 unrouted)
PC0  (1 unrouted)
PC1  (1 unrouted)
PC2  (1 unrouted)
PC3  (1 unrouted)
PC4  (1 unrouted)
PC5  (1 unrouted)
PC6  (1 unrouted)
PC13  (1 unrouted)
PC14  (1 unrouted)
PC15  (1 unrouted)
PD0  (1 unrouted)
PD1  (1 unrouted)
PD7  (1 unrouted)
PD8  (1 unrouted)
PD9  (1 unrouted)
PD10  (1 unrouted)
PD11  (1 unrouted)
PD12  (1 unrouted)
PH0  (1 unrouted)
PH1  (2 unrouted)
R1IN  (2 unrouted)
R1IN_  (2 unrouted)
R2IN  (2 unrouted)
R2IN_  (1 unrouted)
RESET  (2 unrouted)
RTS#  (1 unrouted)
SD_CMD  (2 unrouted)
SD_D0  (2 unrouted)
SD_D1  (2 unrouted)
SD_D2  (2 unrouted)
SD_D3  (2 unrouted)
SD_SCK  (2 unrouted)
T1OUT  (1 unrouted)
T1OUT_  (2 unrouted)
T2OUT  (1 unrouted)
TCK/SWCLK  (1 unrouted)
TDI  (1 unrouted)
TMS/SWDIO  (1 unrouted)
UART4_RX  (2 unrouted)
UART4_TX  (2 unrouted)
USART2_RTS  (2 unrouted)
USART2_RX  (2 unrouted)
USART2_TX  (2 unrouted)
USART3_RX  (1 unrouted)
USART3_TX  (1 unrouted)
VCC  (17 unrouted)
VDDA  (4 unrouted)
VIN  (6 unrouted)
VREF+  (3 unrouted)
(copper drawn outside any net)
  shapes: Top area x1